# EAGLE board bp_pic_programmer_v3 (EAGLE 5.07)
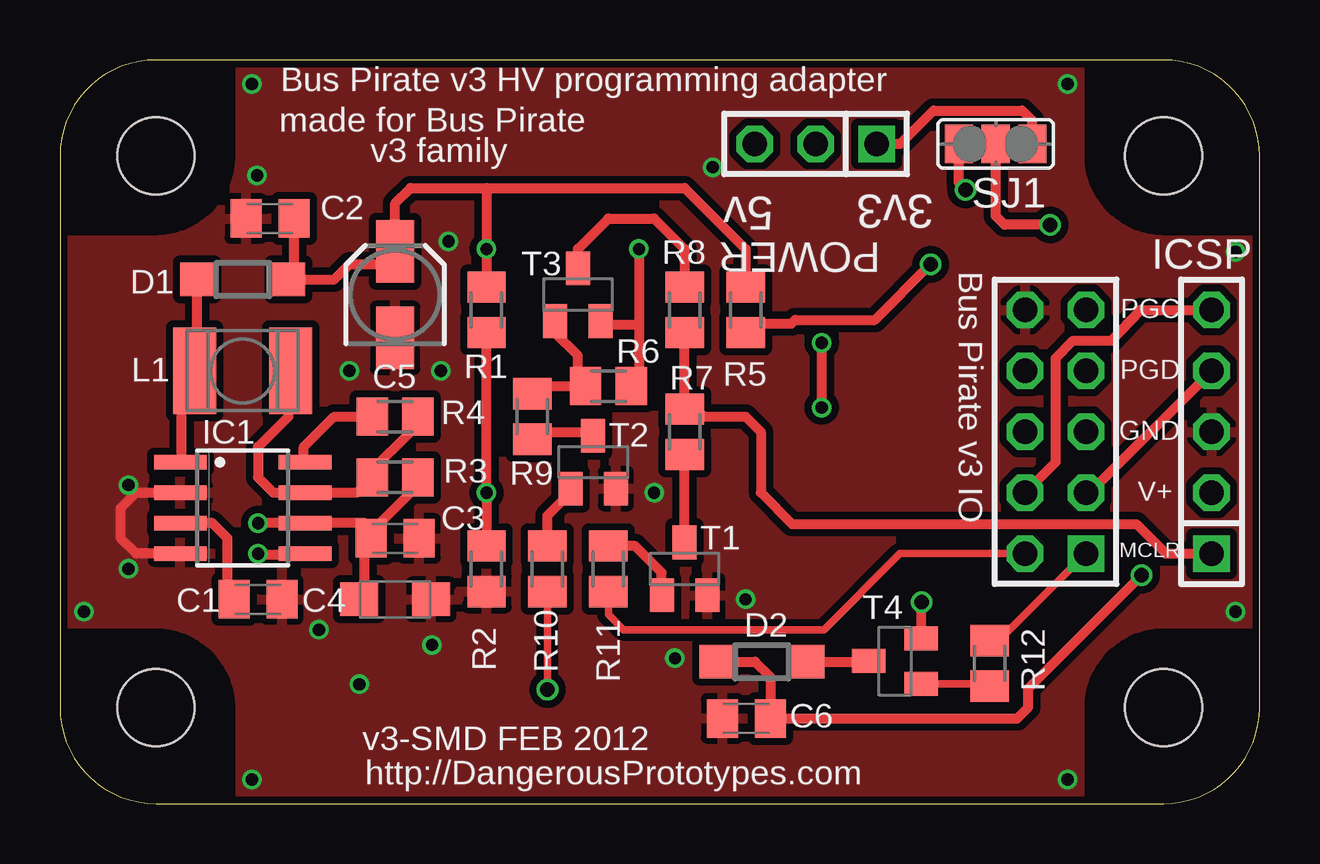
[diagram p0: board, top side]
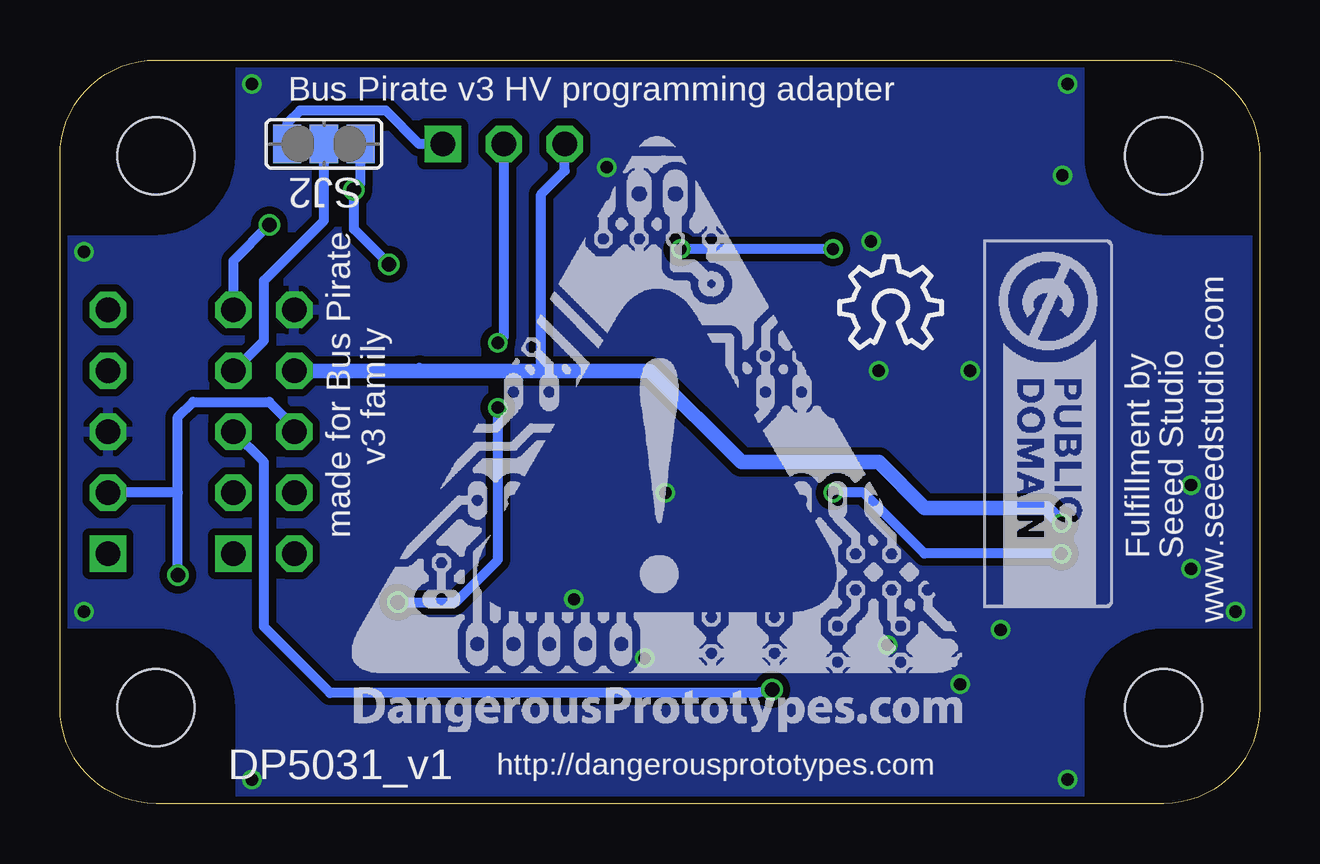
[diagram p1: board, bottom side, seen from below]

Size 50 x 31 mm. Coordinates in mm from the lower left corner, seen from the top.
Copper layers (1*16): Top 0.035mm / dielectric 1.5mm / Bottom 0.035mm
Design rules "Fusion_eagle_rule_v1.1": minimum track width 6mil, minimum drill 12mil, track to track 6mil, track to pad 6mil, pad to pad 6mil, via to via 6mil, smd to smd 0mil, copper to edge 10mil, drill to drill 10mil, minimum pad ring 10mil, minimum via ring 6mil, stop-mask expansion 2mil, vias tented up to drill 100mil, thermal gap 10mil

## Footprints (pad centres in the part's own frame; a part is rotated, then mirrored left to right if it is on the bottom)
C0805K = smd 1.3 x 1.6: 1 -1,0; 2 1,0
SMC_A = smd 1.6 x 1.4: + -1.5,0; - 1.5,0
SANYO-OSCON_SMD_A5 = smd 2.6 x 1.6: + 1.8,0; - -1.8,0
SOD123 = smd 1.4 x 1.4: A 1.9,0; C -1.9,0
SO08 = smd 0.6 x 2.2: 1 -1.905,-2.6; 2 -0.635,-2.6; 3 0.635,-2.6; 4 1.905,-2.6; 5 1.905,2.6; 6 0.635,2.6; 7 -0.635,2.6; 8 -1.905,2.6
1X05 = drill 1.016 square: 1 -5.08,0 | drill 1.016 octagon: 2 -2.54,0; 3 0,0; 4 2.54,0; 5 5.08,0
2X05 = drill 1.016 square: 1 -5.08,-1.27 | drill 1.016 octagon: 2 -5.08,1.27; 3 -2.54,-1.27; 4 -2.54,1.27; 5 0,-1.27; 6 0,1.27; 7 2.54,-1.27; 8 2.54,1.27; 9 5.08,-1.27; 10 5.08,1.27
L4532P = smd 1.8 x 3.6: 1 -2,0; 2 2,0
DP5031_V1 = hole 3.2: 4,4; 46,4; 46,27; 4,27
1X03 = drill 1.016 square: 1 -2.54,0 | drill 1.016 octagon: 2 0,0; 3 2.54,0
M0805 = smd 1.3 x 1.6: 1 -0.95,0; 2 0.95,0
SJ_2 = smd 1.168 x 1.6: 1 -1.524,0; 2 0,0; 3 1.524,0
SOT23-BEC = smd 1 x 1.4: B -0.95,-1.1; C 0,1.1; E 0.95,-1.1

## Placement (x,y rotation side)
C1  470pF  [C0805K]  8.26,8.52 0 top
C2  0.1uF/50V  [C0805K]  8.76,24.39 180 top
C3  0.1uF  [C0805K]  13.97,11.05 0 top
C4  10uF  [SMC_A]  13.97,8.52 0 top
C5  4.7uF/35V  [SANYO-OSCON_SMD_A5]  13.97,21.21 90 top
C6  0.1uF/50V  [C0805K]  28.61,3.55 180 top
D1  1N5819, 20V, 1A+  [SOD123]  7.62,21.85 180 top
D2  1N5819, 20V, 1A+  [SOD123]  29.25,5.91 0 top
IC1  MC34063AD  [SO08]  7.62,12.32 270 top
ICSP  [1X05]  48,15.5 90 top
JP1  FEMALE!!  [2X05]  41.5,15.5 90 top
L1  680uH/0.12A  [L4532P]  7.62,18.04 0 top
PCB1  PCB_DP_RECTANGLE-31X50  [DP5031_V1]  0,0 0 top
POWER  [1X03]  31.5,27.5 180 top
R1  20K  [M0805]  17.78,20.58 270 top
R2  2K2  [M0805]  17.78,9.79 270 top
R3  4R7  [M0805]  13.97,13.6 180 top
R4  180R  [M0805]  13.97,16.14 0 top
R5  39K  [M0805]  28.57,20.58 90 top
R6  100K  [M0805]  22.86,17.41 0 top
R7  100R  [M0805]  26.04,15.5 90 top
R8  10K  [M0805]  26.04,20.58 90 top
R9  10K  [M0805]  19.68,16.14 90 top
R10  10K  [M0805]  20.32,9.79 90 top
R11  10K  [M0805]  22.86,9.79 90 top
R12  10K  [M0805]  38.74,5.84 270 top
SJ1  [SJ_2]  39,27.5 0 top
SJ2  [SJ_2]  39,27.5 180 bottom
T1  NPN, 200mA+, 30+hfe  [SOT23-BEC]  26.04,9.79 0 top
T2  NPN, 200mA+, 30+hfe  [SOT23-BEC]  22.23,14.23 0 top
T3  PNP, 200mA+, 30hfe  [SOT23-BEC]  21.59,21.21 0 top
T4  PNP, 1A+, 40+ hef  [SOT23-BEC]  34.8,5.94 90 top
U$1  [LOGO_CC-0]  11.5,23.5 270 bottom
U$2  [OSHW_8X150_NOTEXT]  17.5,19 0 bottom
U$4  [DP_LOGO_ART_1X1]  37.8,3 0 bottom

## Library data of the parts
C1-C6 L1 R1-R12 = rcl
D1 D2 = diode
IC1 = v-reg-3
ICSP JP1 POWER = pinhead-2
PCB1 = PCBStandards
SJ1 SJ2 = jumper
T1-T4 = dp_devices
U$1 = DP
U$2 = ohw-logo
U$4 = DP2

## Nets
3V3: POWER.1 SJ1.3 SJ2.3
3V3(V3)ADC(V2GO): JP1.9 SJ1.2
5V: C3.1 C4.+ IC1.6 JP1.8 POWER.3 R3.1
13V: C2.1 C5.+ D1.C R1.1 R5.2 R6.2 T3.E
ADC: R5.1 SJ1.1 SJ2.1
ADC(V3)3V3(V2GO): JP1.7 SJ2.2
GND: C1.2 C2.2 C3.2 C4.- C5.- C6.2 IC1.2 IC1.4 ICSP.3 JP1.10 R2.2 T1.E T2.E
MCLR: JP1.2 R11.1
MISO: JP1.1 R12.1
N$1: R12.2 T4.B
N$3: R7.1 T1.C
N$4: R8.2 T3.C
N$5: R9.1 T2.C
N$6: R6.1 R9.2 T3.B
N$7: R11.2 T1.B
N$8: R10.2 T2.B
N$9: IC1.8 R4.1
N$10: D2.A T4.C
N$11: IC1.7 L1.2 R3.2 R4.2
N$14: IC1.5 R1.2 R2.1
N$17: D1.A IC1.1 L1.1
N$19: C1.1 IC1.3
PGC: ICSP.5 JP1.4
PGD: ICSP.4 JP1.3
VDD_SWITCH: POWER.2 T4.E
VPP: ICSP.1 R7.2 R8.1
VPPEN: JP1.5 R10.1
VTARGET: C6.1 D2.C ICSP.2 JP1.6

## Tracks (layer width: path | path; a pad name or v marks a point on that pad's centre or on a via)
3V3
  Top 0.406: POWER.1 34.32,27.51 35.02,27.51 36.41,28.89 40.11,28.89 40.5,28.5 40.5,27.52 SJ2.3
  Bottom 0.406: POWER.1 35.02,27.5 36.41,28.89 40,28.89 40.52,28.36 SJ2.3
3V3(V3)ADC(V2GO)  (via drill 0.6)
  Top 0.406: SJ1.2 39,24.5 39.37,24.13 v41.27,24.13
  Bottom 0.406: JP1.9 42.77,22.64 v41.27,24.13
5V  (via drill 0.51)
  Top 0.406: 12.7,11.05 C3.1 13.34,11.42 13.34,11.69 14.61,12.96 14.61,13.28 R3.1 15.24,13.28 | v8.26,11.69 IC1.6 12.7,11.69 12.7,11.05 | 12.7,11.05 12.7,8.74 C4.+ 12.65,8.52 12.6,8.46
  Bottom 0.406: 35.38,18.04 35.02,18.18 | POWER.3 28.96,26.39 29.95,25.4 29.95,18.04 30.48,18.04
  Bottom 0.61: JP1.8 35.38,18.04 30.48,18.04 25.4,18.04 21.59,14.23 15.88,14.23 13.97,12.32 8.89,12.32 v8.26,11.69
13V  (via drill 0.51)
  Top 0.406: C2.1 9.76,21.61 D1.C 11.43,21.85 12.06,22.48 13.97,22.48 C5.+ | C5.+ 14.13,23.17 | R1.1 v17.78,23.12 17.78,25.66 | R5.2 28.57,23.12 26.04,25.66 17.78,25.66 | 17.78,25.66 14.61,25.66 13.97,25.02 C5.+ | R6.2 24.13,17.41 24.13,19.95 | T3.E 22.69,20.11 22.86,19.95 24.13,19.95 | v24.13,23.12 24.13,19.95
  Bottom 0.406: v17.78,23.12 v24.13,23.12
ADC  (via drill 0.6)
  Top 0.406: SJ2.1 37.48,25.85 v37.75,25.58 | 28.57,20 R5.1 28.57,19.84 28.73,20 30.48,20 30.64,20.16 33.97,20.16 v36.29,22.48
  Bottom 0.406: 37.78,27.49 SJ2.1 37.48,25.85 v37.75,25.58 37.75,23.94 v36.29,22.48
ADC(V3)3V3(V2GO)
  Bottom 0.406: SJ2.2 39,24.31 41.5,21.81 41.5,19.31 JP1.7
GND  (via drill 0.51)
  Top 0.406: IC1.2 3.17,12.96 2.54,12.32 2.54,11.05 3.17,10.42 IC1.4
  other vias: 28.57,8.52 24.77,12.96 12.06,18.04 15.88,18.04 1,8 15.51,6.61 10.79,7.25 2.86,13.28 2.86,9.79 27.21,26.52 12.48,4.97 8.21,26.19 16.19,23.44 25.63,6.05 8,1 42,1 49,8 49,23 42,30 8,30
  pour Bottom (isolate 0.305): -0.1,31.17 -0.1,-0.19 50.12,-0.19 50.12,31.17
  pour Top (isolate 0.305): -0.1,31.17 50.12,31.17 50.12,-0.19 -0.1,-0.19
MCLR
  Top 0.305: R11.1 22.86,7.88 23.5,7.25 31.84,7.25 35.02,10.42 JP1.2
MISO
  Top 0.305: R12.1 38.77,6.82 39.17,6.82 JP1.1
N$1
  Top 0.305: T4.B 38.65,4.99 R12.2
N$2
  Top 0.406: 40.5,27.48 39.5,27.48
N$3
  Top 0.406: T1.C R7.1
N$4
  Top 0.406: R8.2 26.04,23.12 24.77,24.39 22.86,24.39 21.59,23.12 T3.C
N$5
  Top 0.406: T2.C 22.23,15.5 20,15.5 R9.1
N$6
  Top 0.406: 20.32,20.58 20.64,20.26 T3.B 20.64,19.62 21.59,18.68 21.59,17.73 R6.1 20,17.41 R9.2
N$7
  Top 0.406: R11.2 23.97,10.73 25.08,9.63 T1.B
N$8
  Top 0.406: R10.2 20.32,12.01 21.27,12.96 T2.B
N$9
  Top 0.406: R4.1 11.43,16.14 10.16,14.87 10.16,14.29 IC1.8
N$10
  Top 0.406: D2.A 33.67,5.91 T4.C
N$11
  Top 0.406: R4.2 14.61,15.82 14.61,15.5 13.02,13.91 R3.2 12.38,12.96 IC1.7 8.89,12.96 8.26,13.6 8.26,14.87 9.53,16.14 9.53,18.04 L1.2
N$12
  Bottom 0.406: 38,27.48 39,27.48
N$14  (via drill 0.51)
  Top 0.406: IC1.5 10.2,10.39 8.23,10.39 v8.26,10.42 | R2.1 v17.78,12.96 R1.2
  Bottom 0.406: v8.26,10.42 13.97,10.42 16.51,12.96 v17.78,12.96
N$17
  Top 0.406: 5.62,21.75 D1.A 5.71,18.04 L1.1 5.02,17.44 5.08,17.38 5.08,14.23 IC1.1
N$19
  Top 0.406: IC1.3 6.35,11.69 6.99,11.05 6.99,8.15 C1.1
PGC
  Top 0.406: ICSP.5 45.03,20.58 43.81,19.3 42.23,19.3 41.5,18.57 41.5,14.23 JP1.4
PGD
  Top 0.406: JP1.3 42.92,12.96 ICSP.4
VDD_SWITCH  (via drill 0.51, 0.6)
  Top 0.406: v35.91,8.39 35.91,6.9 T4.E | v31.75,16.51 v31.75,19.21
  Bottom 0.406: POWER.2 31.5,19.46 v31.75,19.21 | v35.91,8.39 33.52,8.39 31.75,10.16 v31.75,16.51
VPP
  Top 0.305: R7.2 26.67,16.14
  Top 0.406: R8.1 R7.2 26.71,16.26 | ICSP.1 46.09,10.42 44.85,11.65 39,11.65 38.2,11.65 30.52,11.65 29.21,12.96 29.21,15.5 28.57,16.14 26.67,16.14
VPPEN  (via drill 0.6)
  Top 0.305: v20.32,4.75 R10.1
  Bottom 0.406: v20.32,4.75 20.95,4.61 38.74,4.61 41.5,7.37 41.5,14.23 JP1.5
VTARGET  (via drill 0.6)
  Top 0.406: D2.C 28.98,5.91 29.61,5.27 C6.1 39.9,3.55 40.36,4.01 40.36,4.8 v45.09,9.53
  Bottom 0.406: 45.09,12.96 ICSP.2 | v45.09,9.53 45.09,12.96 | 45.09,12.96 45.09,16.11 44.45,16.75 41.27,16.75 40.23,15.71 JP1.6

## Text on the board
tPlace: Bus Pirate v3 HV programming adapter | made for Bus Pirate | v3 family | Bus Pirate v3 IO | PGC | PGD | GND | V+ | MCLR | v3-SMD FEB 2012 | http://DangerousPrototypes.com
tNames: 5v | 3v3
bNames: Bus Pirate v3 HV programming adapter | made for Bus Pirate | v3 family | Seeed Studio | Fulfillment by | www.seeedstudio.com | http://dangerousprototypes.com